# Altium PCB 驱动.PcbDoc (part 3 of 3)
Units mm, origin at the board's own origin, x right, y up, seen from the top; angles counter-clockwise.
Board outline 185 x 120 mm, 2 copper layers (Top Layer, Bottom Layer); 132 components, 68 nets, 349 pads, 106 vias.
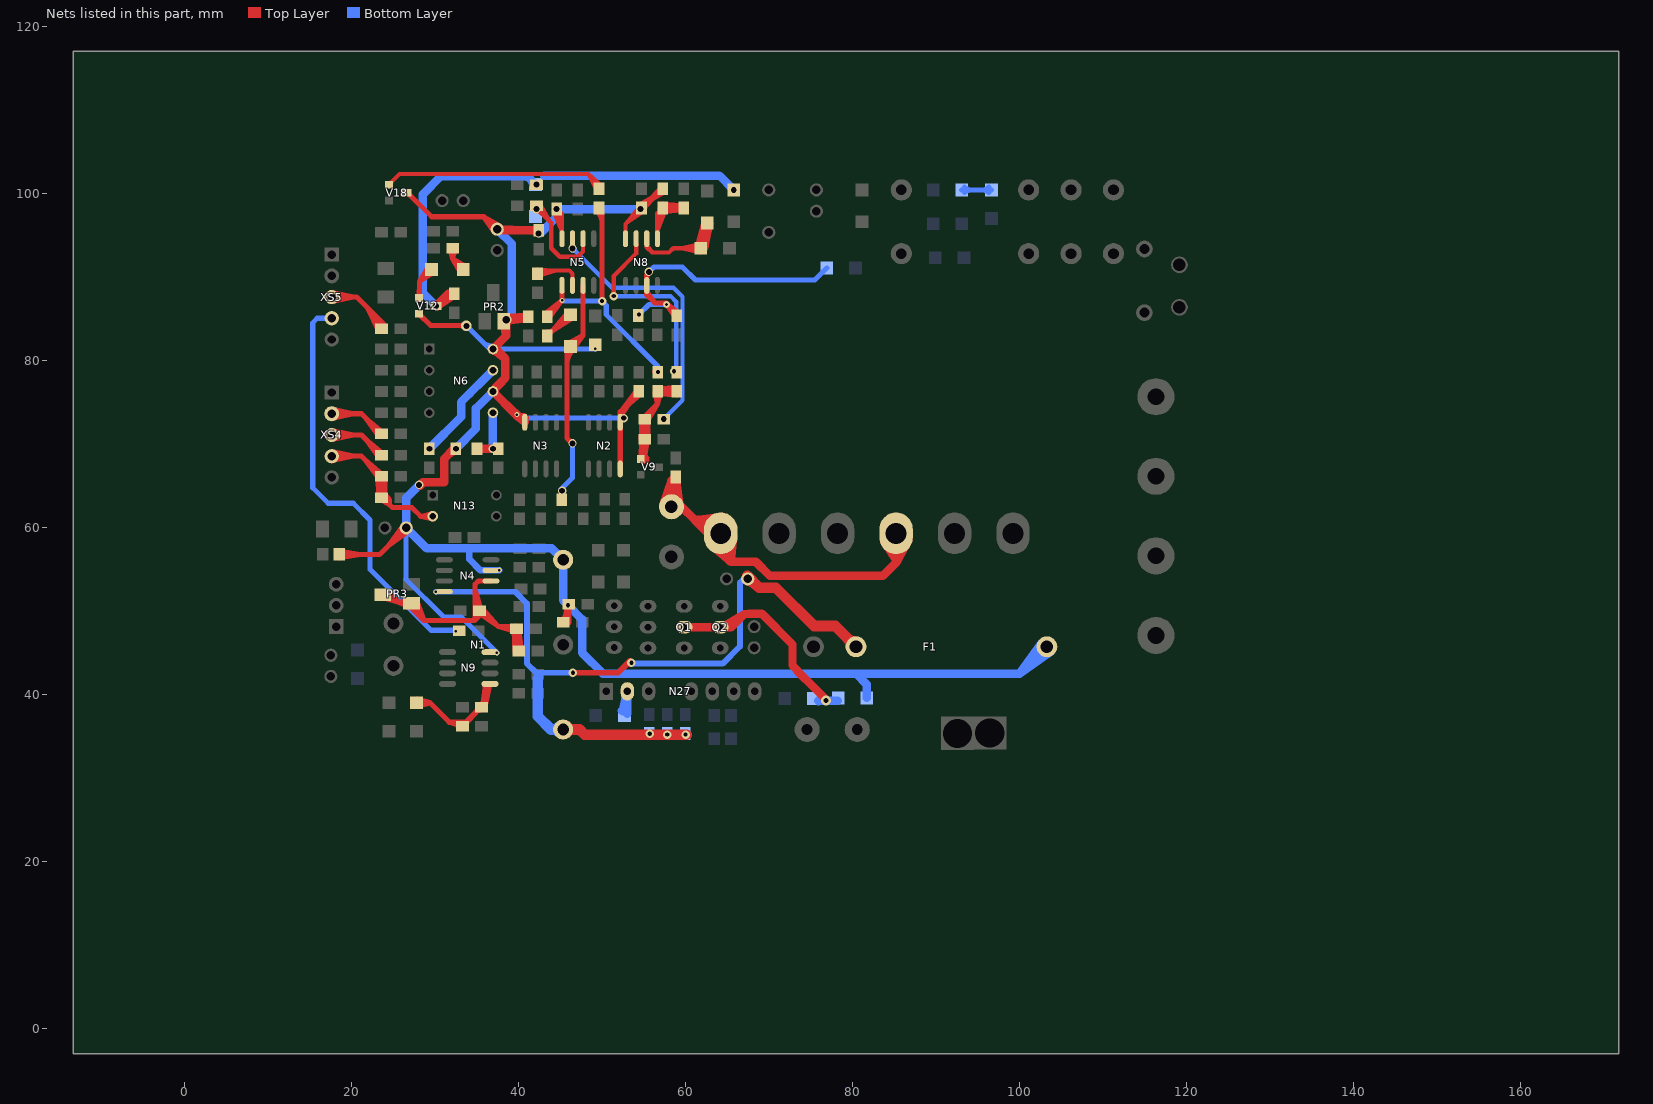
[diagram p3: the nets of this part, all layers, seen from the top]

## Via types
v1: diameter 1.016, hole 0.711, Top Layer to Bottom Layer, 31 vias
v2: diameter 1, hole 0.5, Top Layer to Bottom Layer, 28 vias
v3: diameter 0.6, hole 0.3, Top Layer to Bottom Layer, 23 vias
v4: diameter 1, hole 0.6, Top Layer to Bottom Layer, 5 vias
v5: diameter 1.016, hole 0.635, Top Layer to Bottom Layer, 4 vias
v6: diameter 1.2, hole 0.6, Top Layer to Bottom Layer, 4 vias
v7: diameter 1.1, hole 0.6, Top Layer to Bottom Layer, 3 vias
v8: diameter 0.8, hole 0.4, Top Layer to Bottom Layer, 2 vias
v9: diameter 1.27, hole 0.762, Top Layer to Bottom Layer, 2 vias
v10: diameter 0.8, hole 0.5, Top Layer to Bottom Layer, 2 vias
v11: diameter 1.27, hole 0.889, Top Layer to Bottom Layer, 1 vias
v12: diameter 1.27, hole 0.711, Top Layer to Bottom Layer, 1 vias

## Nets (pads, with @x,y where several pads share a name; then routed paths per layer and width w, separated by ;. In a path a pad name is that pad's centre, name@x,y a point inside that pad or via, vN(x,y) a via of type N, cw(c..) or ccw(c..) an arc to the next point about the centre after c; other vN are vias at no path point) (continued)
NetN4_6: N4.6 PR3.2 PR3.W R14.2 R16.1 R22.1 | length 138.5
  Top Layer w0.61: PR3.W@23.749,51.943 24.757,51.943 ; PR3.W@23.829,51.531 25.7,51 ; PR3.W@24.258,52.305 25.7,51 ; PR3.2@26.822,50.495 25.7,51 ; PR3.2@26.874,51.369 25.7,51 ; PR3.2@26.928,50.927 25.7,51 ; PR3.2@27.067,50.667 28.656,48.844 ; PR3.2@27.428,50.927 28.656,48.844 ; PR3.2@27.831,51.117 28.656,48.844 ; R16.1@34.8,49.8 34.8,53.2 35.194,53.594 ; R16.1@34.85,50.011 34.8,52.591 ; R16.1@34.857,50.11 34.744,48.844 ; R16.1@35.229,49.778 37.482,48.218 ; R16.1@35.433,50.038 37.482,48.218 ; R16.1@35.472,49.886 34.744,48.844 ; R16.1@35.5,50.2 37.567,48.133 ; R16.1@35.502,50.107 34.8,52.591 ; R16.1@35.667,50.271 37.482,48.218 ; R16.1@35.7,49.8 34.744,48.844 ; N4.6@35.992,53.594 35.194,53.594 ; N4.6@36.703,53.594 35.194,53.594 ; 38.214,48.133 cw(c38.214,46.469) R22.1@39.391,47.646 ; 38.468,48.133 cw(c38.468,46.469) 39.645,47.646 cw(c38.774,46.775) 40.005,46.775 ; R22.1@39.425,47.824 R14.2@40.005,45.386 ; R14.2@39.549,45.179 R22.1@39.471,47.634 ; R22.1@39.558,47.556 37.567,48.133 ; R22.1@39.624,47.879 37.567,48.133 ; R22.1@39.638,48.209 37.567,48.133 ; R14.2@39.675,45.203 R22.1@39.773,47.668 ; R14.2@39.676,45.234 40.005,47.676 R14.2@40.334,45.234 ; R14.2@39.676,45.243 R22.1@40.074,47.675 ; R22.1@39.751,47.879 R14.2@40.005,45.386 ; R22.1@39.772,47.646 cw(c39.208,47.082) 40.005,47.082 cw(c40.802,47.082) R22.1@40.238,47.646 ; R14.2@39.878,45.212 R22.1@39.471,47.634 ; R22.1@40,48.1 40.005,48.095 40.005,47.879 R14.2@40.005,45.212 ; R22.1@40,48.133 37.567,48.133 ; R22.1@40.081,47.891 R14.2@40.005,45.386 ; R14.2@40.199,45.289 R22.1@39.471,47.634 ; R14.2@40.331,45.265 R22.1@39.773,47.668 ; R14.2@40.335,45.225 R22.1@40.074,47.675 ; PR3.W@23.999,51.943 24.757,51.943 ; PR3.W@23.999,51.943 25.7,51 ; PR3.W@23.999,51.943 24.757,51.943 ; 24.757,51.943 cw(c24.757,52.366) 24.388,52.16 ccw(c24.757,52.366) 24.757,51.943 ; 24.757,51.943 ccw(c24.757,51.52) 24.388,51.726 cw(c24.757,51.52) 24.757,51.943 ; 24.757,51.943 25.7,51 ; 24.757,51.943 24.13,52.369 24.757,51.943 ; 24.757,51.943 24.13,51.517 24.757,51.943 ; 25.7,51 cw(c25.7,49.731) 26.609,50.616 ccw(c25.7,49.731) 25.7,51 ; 25.7,51 26.5,51 28.656,48.844 ; 28.656,48.844 34.744,48.844 ; 34.744,48.844 35.179,50.038 34.8,52.591 ; R22.1@39.773,47.668 R14.2@40.005,45.212 ; R14.2@40.005,45.212 R22.1@40.074,47.675 ; 40.005,46.009 cw(c39.208,46.009) 39.772,45.445 ccw(c39.208,46.009) 40.005,46.009 ; 40.005,46.009 ccw(c40.802,46.009) 40.238,45.445 cw(c40.802,46.009) 40.005,46.009 ; PR3.W@23.999,52.107 cw(c23.999,50.674) 25.012,51.688 ccw(c23.999,50.674) PR3.W@23.999,52.107 ; PR3.W@24.285,51.602 cw(c24.69,51.118) 25.136,51.564 ccw(c24.69,51.118) PR3.W@24.285,51.602 ; 26.029,51 ccw(c26.029,51.826) 26.613,51.242 cw(c26.029,51.826) 26.029,51 ; PR3.2@26.689,51.157 ccw(c27.126,51.021) 26.802,50.698 cw(c27.126,51.021) PR3.2@26.689,51.157 ; PR3.2@27.271,50.976 ccw(c28.213,50.682) 27.515,49.985 cw(c28.213,50.682) PR3.2@27.271,50.976 ; PR3.2@27.853,50.794 ccw(c29.3,50.343) 28.228,49.272 cw(c29.3,50.343) PR3.2@27.853,50.794 ; 34.8,51.75 ccw(c36.891,51.75) 35.412,50.271 cw(c36.891,51.75) 34.8,51.75 ; R16.1@35.433,49.708 cw(c35.433,48.358) 36.388,49.312 ccw(c35.433,48.358) R16.1@35.433,49.708
NetN5_1: N5.1 R29.2 R36.2 R41.2 | length 44.3
  Top Layer w0.61: R36.2@43.211,85.587 v3@45.1,87.1 ; R36.2@43.4,85.6 v3@45.1,87.1 ; R36.2@43.434,85.344 v3@45.1,87.1 ; R36.2@43.688,85.134 v3@45.1,87.1 ; N5.1@45.185,88.274 v3(45.2,87.2) N5.1@45.2,88.2 ; R41.2@49.9,97.7 50,97.6 v2@50,87.2 ; R29.2@56.26,78.671 R29.2@56.372,78.671 ; R36.2@43.764,85.323 cw(c45.29,85.228) 44.278,86.375 ccw(c45.29,85.228) R36.2@43.764,85.323 ; R41.2@49.397,97.896 cw(c47.94,96.439) 50,96.439 ccw(c47.94,96.439) R41.2@49.397,97.896
  Bottom Layer w0.61: v3(45.2,87.2) 45.1,87.1 v2(50,87.1) 50.5,86.6 50.5,85.479 56.7,79.279 v2(56.7,78.6) v2@56.7,78.5
NetN5_2: N5.2 R42.1 | length 17.4
  Top Layer w0.508: R42.1@42.253,90.89 44.498,90.763 ; R42.1@42.264,90.509 44.498,90.763 ; R42.1@42.264,90.763 46.074,90.763 46.455,90.382 ; R42.1@42.339,90.135 44.498,90.763 ; N5.2@46.455,88.985 46.455,90.382 ; N5.2@46.455,89.696 46.455,90.382 ; R42.1@42.533,90.24 cw(c43.797,88.976) 43.797,90.763 ; R42.1@42.533,90.24 cw(c43.797,88.976) 43.797,90.763 ; R42.1@42.533,90.24 cw(c43.797,88.976) 43.797,90.763
NetN5_3: N5.3 R38.1 V13.K | length 43.8
  Top Layer w0.61: V13.K@45.956,82.039 47.725,83.025 ; V13.K@46.2,81.6 V13.K@46.228,81.6 ; v1@46.5,70 45.8,70.7 45.8,71.2 45.796,71.204 45.796,81.096 46.228,81.528 V13.K@46.228,81.6 ; V13.K@46.579,81.355 47.725,83.025 ; 47.725,86.14 N5.3@47.725,88.274 ; N5.3@47.725,88.985 47.725,83.025 ; V13.K@46.228,81.6 46.3,81.6 47.725,83.025 ; V13.K@46.228,81.6 V13.K@46.228,81.661 47.725,83.025 ; 45.796,79.495 cw(c48.394,79.495) 46.557,81.332 ccw(c48.394,79.495) 45.796,79.495 ; V13.K@45.796,80.967 cw(c46.922,80.967) 46.126,81.763 ccw(c46.922,80.967) V13.K@45.796,80.967 ; V13.K@46.228,82.126 ccw(c46.228,83.57) 47.249,82.549 cw(c46.228,83.57) V13.K@46.228,82.126 ; V13.K@46.693,81.661 cw(c47.495,81.661) 46.928,82.228 ccw(c47.495,81.661) V13.K@46.693,81.661
  Bottom Layer w0.61: v1@45.1,64.6 46.455,65.955 v1(46.455,70.062)
  other v1: 45.2,64.4
NetN5_6: N5.6 R31.1 V11.A | length 25.2
  Top Layer w0.508: R31.1@41.985,98.25 43.691,96.702 ; R31.1@42.137,97.875 cw(c42.137,96.955) 42.787,97.606 ; R31.1@42.137,98.51 42.137,98.256 43.915,96.478 43.915,93.43 44.931,92.414 47.09,92.414 47.725,93.049 ; R31.1@42.264,98.51 43.691,96.702 ; R31.1@42.582,98.721 43.691,96.702 ; N5.6@47.725,93.862 47.725,93.049 ; N5.6@47.725,95.164 N5.6@47.725,94.573 47.725,93.049 ; R31.1@42.645,98.51 ccw(c44.485,98.51) 43.184,97.209 ; R31.1@42.645,98.51 ccw(c44.485,98.51) 43.184,97.209 ; R31.1@42.645,98.51 ccw(c44.485,98.51) 43.184,97.209
  other v1: 42.137,98.129
NetN5_7: N5.7 R39.1 | length 35.6
  Top Layer w0.508: v1@46.275,93.61 ccw(c45.842,94.043) 46.455,94.043 ccw(c47.068,94.043) v1@46.635,93.61 ; N5.7@46.455,93.862 v1(46.455,93.43) N5.7@46.455,94.573
  Bottom Layer w0.508: v1@46.455,93.176 cw(c46.455,92.563) 46.889,92.996 cw(c47.322,93.43) v1@46.709,93.43 ; v1(46.455,93.43) 51.177,88.708 58.543,88.708 59.629,87.622 59.629,82.425 59.628,75.234 v1(57.377,72.983) ; v1@57.377,73.237 ccw(c57.377,73.85) 57.811,73.417 ccw(c58.244,72.983) v1@57.631,72.983
NetN6_5: N6.5 R24.1 R34.2 | length 13.1
  Top Layer w1.016: R34.2@35.025,69.427 R24.1@37.565,69.427 R34.2@35.025,69.427
  Bottom Layer w1.016: v1(36.93,69.427) N6.5@36.93,73.745 36.93,70.062
NetN6_7: N6.7 R35.2 | length 16.5
  Bottom Layer w1.016: v1(29.31,69.427) 33.12,73.237 33.12,75.015 N6.7@36.93,78.825 34.14,76.035
NetN8_3: N8.3 R47.1 R52.1 R145.1 | length 45.4
  Top Layer w0.61: N8.3@55.345,89.696 55.345,90.255 N8.3@55.345,88.985 55.345,87.855 ; R145.1@58.668,85.267 v8@57.6,86.9 ; R145.1@58.8,85.7 v8@57.6,86.9 ; R145.1@58.928,85.471 v8@57.6,86.9 ; R145.1@59.15,85.715 v8@57.6,86.9 ; 55.345,87.855 56.3,86.9 ; 55.345,87.855 N8.3@55.345,88.274 ; 55.345,87.855 N8.3@55.345,88.274 ; N8.3@55.345,88.274 ccw(c56.356,88.274) 55.641,87.559 cw(c56.356,88.274) N8.3@55.345,88.274 ; N8.3@55.345,88.274 56.3,86.9 ; 56.3,86.9 v8@57.6,86.9 ; 58.293,86.207 cw(c57.557,85.471) 58.598,85.471 ccw(c57.557,85.471) 58.293,86.207
  Bottom Layer w0.61: v2(54.4,85.5) 55.6,86.7 v8(57.7,86.7) ; v1@55.641,90.641 56.2,91.2 59.6,91.2 61.18,89.62 75.468,89.62 R52.1@76.903,91.056
  other v1: 55.6,90.6
NetN8_5: N8.5 R10.1 R11.1 | length 66.7
  Top Layer w0.508: N8.5@56.615,94.573 56.615,97.621 R11.1@57.25,98.256 ; N8.5@56.615,95.284 56.615,97.113 ; R11.1@56.875,98.194 N8.5@56.615,95.578 ; R11.1@57.25,98.383 R10.1@59.399,98.572 ; R11.1@57.25,97.748 R10.1@59.399,97.94 ; R11.1@57.25,98.764 R10.1@59.399,98.572 ; R11.1@57.317,98.008 R10.1@59.399,98.572 ; R11.1@57.317,98.504 R10.1@59.399,97.94 ; R11.1@57.612,98.01 N8.5@56.615,95.578 ; R10.1@59.756,97.876 R11.1@57.631,98.256 ; R10.1@59.756,98.636 R11.1@57.631,98.256 ; N8.5@56.615,95.578 57.25,98.129 R10.1@59.399,97.94 ; 56.615,95.676 cw(c59.703,95.676) R11.1@57.519,97.86 ; 56.615,95.676 cw(c59.703,95.676) R11.1@57.519,97.86 ; 56.615,95.676 cw(c59.703,95.676) R11.1@57.519,97.86 ; 56.615,96.903 cw(c58.476,96.903) R11.1@57.16,98.219 ; 56.615,96.903 cw(c58.476,96.903) R11.1@57.16,98.219 ; 56.615,96.903 cw(c58.476,96.903) R11.1@57.16,98.219 ; R11.1@57.25,98.256 R10.1@59.79,98.256 R11.1@57.631,98.256 ; R11.1@57.25,98.256 R10.1@59.409,98.256 ; R11.1@57.519,97.987 cw(c58.17,97.336) 58.17,98.256 ; R11.1@57.519,97.987 cw(c58.17,97.336) 58.17,98.256 ; R11.1@57.519,97.987 cw(c58.17,97.336) 58.17,98.256 ; R11.1@57.519,98.525 ccw(c58.17,99.176) 58.17,98.256 ; R11.1@57.519,98.525 ccw(c58.17,99.176) 58.17,98.256 ; R11.1@57.519,98.525 ccw(c58.17,99.176) 58.17,98.256 ; 58.87,98.256 cw(c58.87,97.336) R10.1@59.521,97.987 ; 58.87,98.256 ccw(c58.87,99.176) R10.1@59.521,98.525 ; 58.87,98.256 cw(c58.87,97.336) R10.1@59.521,97.987 ; 58.87,98.256 ccw(c58.87,99.176) R10.1@59.521,98.525 ; 58.87,98.256 ccw(c58.87,99.176) R10.1@59.521,98.525 ; 58.87,98.256 cw(c58.87,97.336) R10.1@59.521,97.987 ; R10.1@59.409,98.256 57.284,98.636 R10.1@59.409,98.256 ; R10.1@59.409,98.256 57.284,97.876 R10.1@59.409,98.256
NetN8_6: N8.6 R17.1 V8.K | length 80.2
  Top Layer w0.508: N8.6@55.345,93.862 55.98,92.922 ; N8.6@55.345,94.573 55.345,93.557 55.98,92.922 ; R17.1@61.322,93.519 V8.K@62.086,96.358 ; R17.1@61.344,93.603 V8.K@62.584,96.287 ; R17.1@61.378,93.678 V8.K@63.024,96.103 ; R17.1@61.695,93.557 R17.1@61.822,93.43 ; R17.1@61.766,92.925 59.536,93.43 R17.1@61.766,93.935 ; V8.K@62.071,96.42 62.584,94.192 ; R17.1@62.302,93.263 V8.K@63.024,96.103 ; R17.1@62.322,93.342 V8.K@62.584,96.287 ; R17.1@62.33,93.428 V8.K@62.086,96.358 ; V8.K@63.097,96.42 62.584,94.192 ; N8.6@55.396,93.862 ccw(c56.254,93.862) 55.647,93.255 ; N8.6@55.396,93.862 ccw(c56.254,93.862) 55.647,93.255 ; N8.6@55.396,93.862 ccw(c56.254,93.862) 55.647,93.255 ; 55.98,92.922 58.012,92.922 58.52,93.43 R17.1@61.822,93.43 ; 60.596,93.43 cw(c60.596,92.204) R17.1@61.463,93.071 ; 60.596,93.43 ccw(c60.596,94.656) R17.1@61.463,93.789 ; 60.596,93.43 cw(c60.596,92.204) R17.1@61.463,93.071 ; 60.596,93.43 ccw(c60.596,94.656) R17.1@61.463,93.789 ; 60.596,93.43 ccw(c60.596,94.656) R17.1@61.463,93.789 ; 60.596,93.43 cw(c60.596,92.204) R17.1@61.463,93.071 ; R17.1@61.464,93.791 ccw(c58.8,96.478) V8.K@62.584,96.478 ; R17.1@61.464,93.791 ccw(c58.8,96.478) V8.K@62.584,96.478 ; R17.1@61.464,93.791 ccw(c58.8,96.478) V8.K@62.584,96.478 ; R17.1@61.822,93.43 ccw(c60.009,95.259) 62.584,95.259 ; R17.1@61.822,93.43 ccw(c60.009,95.259) 62.584,95.259 ; R17.1@61.822,93.43 ccw(c60.009,95.259) 62.584,95.259 ; R17.1@61.822,93.43 62.584,94.192 ; R17.1@61.822,93.43 V8.K@62.584,96.287 ; R17.1@61.822,93.43 V8.K@63.024,96.103 ; R17.1@61.822,93.43 V8.K@62.086,96.358 ; R17.1@62.18,93.069 ccw(c61.218,94.04) 62.584,94.04 ; R17.1@62.18,93.069 ccw(c61.218,94.04) 62.584,94.04 ; R17.1@62.18,93.069 ccw(c61.218,94.04) 62.584,94.04 ; V8.K@62.219,96.113 cw(c61.338,95.232) 62.584,95.232 ; V8.K@62.219,96.113 cw(c61.338,95.232) 62.584,95.232 ; V8.K@62.219,96.113 cw(c61.338,95.232) 62.584,95.232 ; 62.584,94.192 V8.K@62.584,96.478 ; 62.584,95.232 cw(c63.83,95.232) V8.K@62.949,96.113 ; 62.584,95.232 cw(c63.83,95.232) V8.K@62.949,96.113 ; 62.584,95.232 cw(c63.83,95.232) V8.K@62.949,96.113
NetN8_7: N8.7 R25.1 | length 24.6
  Top Layer w0.508: v2@51.4,87.8 51.4,90.12 54.075,92.795 ; N8.7@54.075,93.862 54.075,92.795 ; N8.7@54.075,93.938 54.075,92.795
  Bottom Layer w0.508: v2@51.4,87.9 51.6,87.7 58.2,87.7 58.866,87.033 58.866,78.966 v2(58.6,78.7)
  other v2: 51.4,87.7
NetN9_5: N9.5 R72.1 R75.2 R143.1 | length 44.8
  Top Layer w0.635: R72.1@27.774,39.021 29.379,39.021 ; R72.1@27.836,38.58 29.379,39.021 ; R72.1@27.836,39.461 29.379,39.021 ; R143.1@33.147,36.195 31.7,36.7 ; R143.1@33.401,36.195 R75.2@35.208,38.208 ; R143.1@33.642,36.464 R75.2@35.433,38.481 ; R75.2@35.5,38.4 35.4,38.4 33.7,36.7 31.7,36.7 ; R75.2@36,38.4 36,40.699 ; R75.2@36,38.753 N9.5@36.576,41.275 36,40.699 ; N9.5@36.517,41.019 35.687,38.481 36,40.699 ; 28.848,39.021 cw(c28.848,40.094) 28.089,39.335 ccw(c28.848,40.094) 28.848,39.021 ; 28.848,39.021 ccw(c28.848,37.947) 28.089,38.706 cw(c28.848,37.947) 28.848,39.021 ; 29.379,39.021 31.7,36.7 ; 31.7,36.7 cw(c31.7,35.334) 32.874,36.033 ccw(c31.7,35.334) 31.7,36.7 ; 36,40.699 35.916,41.275 36,40.699 ; R143.1@33.718,36.195 cw(c34.982,36.195) 34.089,37.089 ccw(c34.982,36.195) R143.1@33.718,36.195 ; R75.2@34.857,37.857 ccw(c34.233,38.481) 35.115,38.481 cw(c34.233,38.481) R75.2@34.857,37.857 ; R75.2@34.973,37.973 cw(c35.433,37.513) 35.433,38.163 ccw(c35.433,37.513) R75.2@34.973,37.973 ; R75.2@35.462,38.706 ccw(c34.165,40.003) 36,40.003 cw(c34.165,40.003) R75.2@35.462,38.706
NetN27_2: N27.2 R4.2 | length 9.1
  Bottom Layer w1: R4.2@52.356,38.068 ccw(c50.8,39.624) N27.2@53,39.624 ; R4.2@53,37.7 53,40.4 52.451,37.973 N27.2@53.027,40.074
NetQ1_1: Q1.1 Q2.1 R1.2 R3.2 | length 54
  Top Layer w1: Q1.1@59.8,48.1 59.829,48.071 Q2.1@64.135,48.071 65.471,48.071 ; Q1.1@60.067,48.071 Q2.1@63.817,48.071 ; 73.3,43 72.8,43.5 72.8,46 69.126,49.674 67.561,49.674 67.532,49.646 67.046,49.646 ; 73.348,42.852 75.5,40.7 76.8,39.4 v6(76.8,39.3) ; Q2.1@64.385,48.071 67.046,49.646 ; Q2.1@64.385,48.071 65.471,48.071 ; Q2.1@64.385,48.071 65.471,48.071 ; 65.471,48.071 67.046,49.646 ; Q1.1@60.135,48.071 63.885,48.071 Q1.1@60.135,48.071 ; Q2.1@64.385,48.321 ccw(c64.385,51.546) 66.666,49.266 cw(c64.385,51.546) Q2.1@64.385,48.321
  Bottom Layer w1: R3.2@75.843,39.247 R3.2@75.9,39.304 ; R3.2@75.9,39.2 R3.2@75.943,39.243 ; R3.2@75.943,39.243 78.232,39.243 75.97,39.247 78.105,39.243 R3.2@75.943,39.243
NetR5_2: R5.2 R6.1 | length 14
  Bottom Layer w0.61: R5.2@93.064,100.415 R6.1@96.62,100.415 ; R5.2@93.387,100.092 cw(c94.168,99.311) 94.168,100.415 ; R5.2@93.387,100.092 cw(c94.168,99.311) 94.168,100.415 ; R5.2@93.387,100.092 cw(c94.168,99.311) 94.168,100.415 ; R5.2@93.387,100.738 ccw(c94.168,101.519) 94.168,100.415 ; R5.2@93.387,100.738 ccw(c94.168,101.519) 94.168,100.415 ; R5.2@93.387,100.738 ccw(c94.168,101.519) 94.168,100.415 ; 95.516,100.415 cw(c95.516,99.311) R6.1@96.297,100.092 ; 95.516,100.415 ccw(c95.516,101.519) R6.1@96.297,100.738 ; 95.516,100.415 cw(c95.516,99.311) R6.1@96.297,100.092 ; 95.516,100.415 ccw(c95.516,101.519) R6.1@96.297,100.738 ; 95.516,100.415 ccw(c95.516,101.519) R6.1@96.297,100.738 ; 95.516,100.415 cw(c95.516,99.311) R6.1@96.297,100.092
NetR18_0: pad.4 pad.7 R18.0 R21.1 | length 106.6
  Top Layer w1.016: R18.0@57.314,62.642 R21.1@58.293,65.593 ; R18.0@57.343,62.768 R21.1@58.801,65.913 ; R18.0@57.592,63.185 ccw(c55.898,64.879) 58.293,64.879 ccw(c60.688,64.879) R18.0@58.994,63.185 ; R18.0@58.291,62.508 cw(c58.503,60.152) 60.176,61.824 ; 58.293,64.38 cw(c60.334,64.38) R21.1@58.891,65.823 ; R21.1@58.8,66.1 R21.1@58.293,65.593 ; R18.0@59.272,62.642 R21.1@58.293,65.593 ; R18.0@59.285,62.481 R21.1@58.801,65.913 ; 62.315,60.9 cw(c62.315,59.461) pad.4@63.732,59.716 ; pad.4@62.732,59.536 ccw(c61.1,59.242) 61.1,60.9 ; pad.4@62.996,57.918 65.4,55.9 ; pad.4@63.395,58.544 61.1,60.9 ; pad.4@64.2,58.8 65.4,55.9 ; pad.4@64.2,59.3 64.2,57.1 65.4,55.9 ; pad.4@64.2,59.8 61.1,60.9 ; pad.4@64.367,61.283 61.1,60.9 ; pad.4@64.4,59.2 64.5,59.3 64.5,60.9 61.1,60.9 ; pad.4@65.675,59.026 65.4,55.9 ; pad.7@83.772,58.367 85.3,55.9 ; pad.7@84.244,58.154 cw(c82.362,55.899) 85.3,55.899 ; pad.7@84.398,57.542 cw(c83.352,55.898) 85.3,55.898 ; pad.7@85.2,58.8 85.3,55.9 ; 85.3,55.939 cw(c88.561,55.939) pad.7@86.255,58.245 ; pad.7@85.3,59.4 85.3,55.9 ; pad.7@86.134,57.636 ccw(c87.528,55.898) 85.3,55.898 ; pad.7@86.654,58.466 85.3,55.9 ; R18.0@58.293,62.484 59.516,62.484 61.1,60.9 ; R18.0@58.293,62.484 R21.1@58.293,65.593 ; R18.0@58.293,62.484 R21.1@58.801,65.913 ; 65.4,55.9 68.4,55.9 70.1,54.2 83.6,54.2 85.3,55.9
NetR25_2: R25.2 R29.1 R30.1 R39.2 V9.B | length 126.2
  Top Layer w0.61: V9.B@54.502,68.307 ccw(c53.081,69.728) 55.091,69.728 ; R30.1@54.634,70.565 R39.2@54.762,72.96 ; V9.B@54.697,68.074 cw(c55.006,67.633) 55.386,68.014 ; R30.1@54.892,70.62 R39.2@55.42,72.96 ; V9.B@54.933,67.876 ccw(c54.553,68.256) 55.091,68.256 ; R30.1@54.964,70.57 R39.2@54.762,72.96 ; R39.2@54.971,73.202 56.653,74.853 ; 55.091,68.939 ccw(c55.985,68.939) 55.353,68.307 ; R39.2@55.1,73.3 56.653,74.853 ; R30.1@55.218,70.57 R39.2@55.42,72.96 ; R39.2@55.218,72.983 56.653,74.853 ; R30.1@55.29,70.62 R39.2@54.762,72.96 ; R30.1@55.405,70.445 V9.B@54.61,68.199 ; R30.1@55.42,70.546 55.091,68.309 ; R39.2@55.472,73.364 R39.2@55.091,72.983 ; R39.2@55.493,72.801 56.653,74.853 ; R30.1@55.548,70.565 R39.2@55.42,72.96 ; R29.1@56.325,76.132 56.653,74.853 ; R29.1@56.372,76.385 R25.2@58.785,76.385 ; R29.1@56.605,76.152 cw(c57.169,75.588) 57.169,76.385 cw(c57.169,77.182) R29.1@56.605,76.618 ; R29.1@56.653,76.173 56.653,74.853 ; R29.1@56.981,76.132 56.653,74.853 ; R25.2@58.552,76.152 ccw(c57.988,75.588) 57.988,76.385 ccw(c57.988,77.182) R25.2@58.552,76.618 ; R25.2@58.886,76.101 R29.1@56.665,76.63 ; R25.2@58.886,76.499 R29.1@56.692,75.972 ; R25.2@58.906,75.971 R29.1@56.471,76.385 ; R25.2@58.915,75.971 R29.1@56.653,76.3 ; R25.2@58.915,76.629 R29.1@56.653,76.3 ; R25.2@58.928,76.63 R29.1@56.471,76.385 ; R25.2@58.939,76.173 R29.1@56.692,75.972 ; R25.2@58.939,76.427 R29.1@56.665,76.63 ; R25.2@58.944,75.843 R29.1@56.692,75.972 ; R25.2@58.944,76.757 R29.1@56.665,76.63 ; V9.B@54.61,68.199 55.2,68.2 55.091,68.309 ; V9.B@54.61,68.199 55.091,68.309 ; V9.B@54.61,68.199 R30.1@55.091,70.57 ; V9.B@54.61,68.199 55.091,68.309 ; V9.B@54.61,68.199 55.091,68.309 ; V9.B@54.61,68.199 54.762,70.546 55.091,68.309 ; V9.B@54.61,68.199 55.091,68.309 ; R39.2@54.762,72.96 R30.1@55.091,70.57 ; 55.091,68.309 R30.1@55.091,70.57 ; 55.091,69.773 cw(c55.888,69.773) 55.324,70.337 ccw(c55.888,69.773) 55.091,69.773 ; 55.091,69.773 ccw(c54.294,69.773) 54.858,70.337 cw(c54.294,69.773) 55.091,69.773 ; R30.1@55.091,70.57 R39.2@55.091,72.983 ; R30.1@55.091,70.57 R39.2@55.42,72.96 ; R30.1@55.091,70.57 R39.2@55.091,72.983 ; 55.091,71.367 cw(c54.294,71.367) 54.858,70.803 ccw(c54.294,71.367) 55.091,71.367 ; 55.091,71.367 ccw(c55.888,71.367) 55.324,70.803 cw(c55.888,71.367) 55.091,71.367 ; 55.091,72.186 cw(c55.888,72.186) 55.324,72.75 ccw(c55.888,72.186) 55.091,72.186 ; 55.091,72.186 ccw(c54.294,72.186) 54.858,72.75 cw(c54.294,72.186) 55.091,72.186 ; R39.2@55.091,72.983 54.762,70.593 R39.2@55.091,72.983 ; R39.2@55.091,72.983 55.42,70.593 R39.2@55.091,72.983 ; R29.1@56.471,76.385 R25.2@58.939,76.3 R29.1@56.653,76.3 ; 56.653,74.853 R29.1@56.653,76.3 ; 56.653,75.376 cw(c57.45,75.376) 56.886,75.94 ccw(c57.45,75.376) 56.653,75.376 ; 56.653,75.376 ccw(c55.856,75.376) 56.42,75.94 cw(c55.856,75.376) 56.653,75.376 ; R29.1@56.653,76.3 R25.2@58.785,76.385 ; R29.1@56.665,76.63 R25.2@58.785,76.385 ; R29.1@56.692,75.972 R25.2@58.785,76.385 ; R39.2@55.548,72.983 cw(c57.396,72.983) 56.089,74.289 ccw(c57.396,72.983) R39.2@55.548,72.983 ; R29.1@56.886,76.194 cw(c57.349,75.731) 57.349,76.385 ccw(c57.349,75.731) R29.1@56.886,76.194 ; R29.1@56.886,76.66 ccw(c57.552,77.326) 57.552,76.385 cw(c57.552,77.326) R29.1@56.886,76.66 ; 58.04,76.385 ccw(c58.04,77.326) 58.706,76.66 cw(c58.04,77.326) 58.04,76.385 ; 58.243,76.385 cw(c58.243,75.731) 58.706,76.194 ccw(c58.243,75.731) 58.243,76.385
NetR33_2: R33.2 R44.1 V11.K V12.C V15.A | length 74.6
  Top Layer w1.016: 30.67,87.066 cw(c32.274,85.462) R44.1@32.274,87.731 ; 30.67,87.066 cw(c32.274,85.462) R44.1@32.274,87.731 ; 30.67,87.066 cw(c32.274,85.462) R44.1@32.274,87.731 ; 31.588,87.985 R44.1@32.274,87.985 31.588,87.985 ; 31.588,87.985 v1(30.115,86.512) 32.274,87.858 30.293,86.512 31.588,87.985 ; 31.245,87.642 cw(c31.915,86.972) 32.232,87.865 ccw(c31.915,86.972) 31.245,87.642
  Bottom Layer w1.016: v1(30.115,86.512) 28.55,88.077 28.55,99.9 30.716,102.066 40.994,102.066 ; 40.573,102.066 cw(c40.573,100.881) V11.K@41.75,101.019 ; 43.09,102.129 64.045,102.129 v1(65.759,100.415) ; 40.994,102.066 V11.K@42.01,101.05 ; 40.994,102.066 V11.K@42.01,101.05 ; 40.994,102.066 V11.K@42.01,101.05
  other v1: 42.137,101.05
NetR36_1: R36.1 V13.A | length 17
  Top Layer w0.61: R36.1@43.4,82.9 45.971,85.471 V13.A@46.228,85.471 R36.1@44.064,83.564 ; V13.A@45.893,85.794 R36.1@44.064,83.564 ; V13.A@46.506,85.098 R36.1@44.064,83.564 ; R36.1@43.434,83.388 ccw(c43.434,84.485) 44.209,83.709 cw(c43.434,84.485) R36.1@43.434,83.388 ; 44.995,84.495 cw(c46.228,83.262) 46.228,85.006 ccw(c46.228,83.262) 44.995,84.495
NetR41_1: R41.1 V18.B | length 39.6
  Top Layer w0.508: V18.B@24.484,101.05 25.754,102.32 48.36,102.32 ; R41.1@49.308,100.465 48.36,102.32 ; R41.1@49.63,100.542 49.63,101.05 48.36,102.32 ; R41.1@49.63,100.669 48.36,102.32 ; R41.1@49.909,100.928 48.36,102.32 ; V18.B@24.484,101.253 ccw(c24.484,101.744) V18.B@24.831,101.397 ; V18.B@24.484,101.253 ccw(c24.484,101.744) V18.B@24.831,101.397 ; V18.B@24.484,101.253 ccw(c24.484,101.744) V18.B@24.831,101.397 ; V18.B@24.687,101.05 cw(c25.178,101.05) V18.B@24.831,101.397 ; V18.B@24.687,101.05 cw(c25.178,101.05) V18.B@24.831,101.397 ; V18.B@24.687,101.05 cw(c25.178,101.05) V18.B@24.831,101.397 ; 48.71,101.97 cw(c47.409,100.669) R41.1@49.249,100.669 ; 48.71,101.97 cw(c47.409,100.669) R41.1@49.249,100.669 ; 48.71,101.97 cw(c47.409,100.669) R41.1@49.249,100.669
NetR43_2: R43.2 V14.A | length 18.2
  Top Layer w0.61: R43.2@31.777,93.387 32.104,92.16 ; R43.2@32.104,93.43 32.104,92.16 ; R43.2@32.431,93.387 32.104,92.16 ; V14.A@33.005,90.606 32.104,92.16 ; V14.A@33.374,90.89 32.104,92.16 ; V14.A@33.658,91.259 32.104,92.16 ; R43.2@31.871,93.197 cw(c31.307,92.633) 32.104,92.633 ; R43.2@31.871,93.197 cw(c31.307,92.633) 32.104,92.633 ; R43.2@31.871,93.197 cw(c31.307,92.633) 32.104,92.633 ; 32.104,92.633 cw(c32.901,92.633) R43.2@32.337,93.197 ; 32.104,92.633 cw(c32.901,92.633) R43.2@32.337,93.197 ; 32.104,92.633 cw(c32.901,92.633) R43.2@32.337,93.197 ; 32.58,91.684 cw(c31.786,90.89) V14.A@32.909,90.89 ; 32.58,91.684 ccw(c33.374,92.478) V14.A@33.374,91.355 ; 32.58,91.684 cw(c31.786,90.89) V14.A@32.909,90.89 ; 32.58,91.684 ccw(c33.374,92.478) V14.A@33.374,91.355 ; 32.58,91.684 ccw(c33.374,92.478) V14.A@33.374,91.355 ; 32.58,91.684 cw(c31.786,90.89) V14.A@32.909,90.89
NetV12_B: V12.B V14.K | length 18.9
  Top Layer w0.61: V12.B@28.15,87.4 V12.B@28.15,87.544 ; V14.K@29.199,91.178 28.15,89.476 ; V14.K@29.852,90.525 28.15,89.476 ; V12.B@27.975,87.585 ccw(c27.553,88.007) 28.15,88.007 ; V12.B@27.975,87.585 ccw(c27.553,88.007) 28.15,88.007 ; V12.B@27.975,87.585 ccw(c27.553,88.007) 28.15,88.007 ; V12.B@28.15,87.544 28.15,89.476 ; V12.B@28.15,87.544 V12.B@28.083,87.477 28.15,89.476 ; 28.15,89.476 V14.K@29.564,90.89 28.15,89.476 ; 28.77,90.096 cw(c29.564,89.302) V14.K@29.564,90.425 ; 28.77,90.096 ccw(c27.976,90.89) V14.K@29.099,90.89 ; 28.77,90.096 cw(c29.564,89.302) V14.K@29.564,90.425 ; 28.77,90.096 ccw(c27.976,90.89) V14.K@29.099,90.89 ; 28.77,90.096 ccw(c27.976,90.89) V14.K@29.099,90.89 ; 28.77,90.096 cw(c29.564,89.302) V14.K@29.564,90.425
REF+: R13.2 XS4.2 | length 33.5
  Top Layer w0.61: XS4.2@17.499,73.618 21.182,73.618 R13.2@23.595,71.205 22.96,71.84 ; XS4.2@17.626,73.618 20.355,73.618 ; XS4.2@17.691,73.026 20.355,73.618 ; XS4.2@17.691,74.21 20.355,73.618 ; R13.2@23.213,70.995 21.667,73.133 ; R13.2@23.468,71.205 21.667,73.133 ; R13.2@23.695,71.445 21.667,73.133 ; XS4.2@18.047,73.197 cw(c19.063,72.181) 19.063,73.618 ; XS4.2@18.047,73.197 cw(c19.063,72.181) 19.063,73.618 ; XS4.2@18.047,73.197 cw(c19.063,72.181) 19.063,73.618 ; XS4.2@18.047,74.039 ccw(c19.063,75.055) 19.063,73.618 ; XS4.2@18.047,74.039 ccw(c19.063,75.055) 19.063,73.618 ; XS4.2@18.047,74.039 ccw(c19.063,75.055) 19.063,73.618 ; 22.815,71.985 cw(c22.034,71.205) R13.2@23.138,71.205 ; 22.815,71.985 cw(c22.034,71.205) R13.2@23.138,71.205 ; 22.815,71.985 cw(c22.034,71.205) R13.2@23.138,71.205
VCC: C1.1 C2.1 C3.1 C4.1 C5.1 C6.1 C7.1 C8.1 C24.1 C26.1 F1.3 N1.5 N2.4 N2.5 N3.8 N4.7 N5.8 N6.6 N6.8 N8.8 N9.8 PR2.2 R1.1 R11.2 R46.1 R76.1 V12.E V18.C | length 491.5
  Top Layer w0.508: C7.1@44.188,97.883 N5.8@45.185,95.455 ; C7.1@44.192,97.871 45.185,95.712 ; C7.1@44.283,97.73 45.185,97.113 ; C7.1@44.55,97.875 cw(c44.55,97.262) 44.984,97.695 cw(c45.417,98.129) C7.1@44.804,98.129 ; v1(44.55,98.129) 45.185,97.494 N5.8@45.185,94.573 ; C7.1@44.894,98.166 45.185,97.113 ; C7.1@44.924,98.074 45.185,95.712 ; C7.1@44.925,98.067 N5.8@45.185,95.455 ; N5.8@45.185,95.284 45.185,97.113 ; N8.8@52.805,94.573 52.805,96.351 ; N8.8@52.805,95.284 52.805,96.351 ; C8.1@54.429,98.387 52.997,96.543 ; C8.1@54.497,98.699 56.489,99.814 ; C8.1@54.583,97.875 ccw(c54.583,97.262) C8.1@54.149,97.695 ; C8.1@54.583,98.383 ccw(c54.583,98.996) 55.017,98.563 ccw(c55.45,98.129) C8.1@54.837,98.129 ; C8.1@54.71,98.129 52.997,96.543 ; C8.1@54.945,97.829 52.997,96.543 ; C8.1@54.973,98.107 56.489,99.814 ; R11.2@56.99,100.693 55.433,98.979 ; R11.2@57.25,100.415 55.433,98.979 ; R11.2@57.25,100.542 56.996,100.542 C8.1@54.71,98.256 52.805,96.351 ; R11.2@57.461,100.098 55.433,98.979 ; C7.1@44.281,97.733 cw(c42.097,95.549) N5.8@45.185,95.549 ; C7.1@44.281,97.733 cw(c42.097,95.549) N5.8@45.185,95.549 ; C7.1@44.281,97.733 cw(c42.097,95.549) N5.8@45.185,95.549 ; C7.1@44.55,98.002 N5.8@45.185,95.455 ; C7.1@44.55,98.002 45.185,97.113 ; C7.1@44.55,98.002 45.185,95.712 ; C7.1@44.64,98.092 cw(c43.324,96.776) 45.185,96.776 ; C7.1@44.64,98.092 cw(c43.324,96.776) 45.185,96.776 ; C7.1@44.64,98.092 cw(c43.324,96.776) 45.185,96.776 ; 53.843,97.389 cw(c54.71,96.522) C8.1@54.71,97.748 ; 53.843,97.389 cw(c54.71,96.522) C8.1@54.71,97.748 ; 53.843,97.389 cw(c54.71,96.522) C8.1@54.71,97.748 ; C8.1@54.149,97.695 ccw(c53.716,98.129) C8.1@54.329,98.129 ; C8.1@54.149,97.695 ccw(c53.716,98.129) C8.1@54.329,98.129 ; C8.1@54.149,97.695 ccw(c53.716,98.129) C8.1@54.329,98.129 ; C8.1@54.149,97.695 ccw(c53.716,98.129) C8.1@54.329,98.129 ; C8.1@54.533,98.72 55.433,98.979 ; C8.1@54.533,98.72 55.433,98.979 ; C8.1@54.533,98.72 55.433,98.979 ; C8.1@54.71,98.383 55.433,98.979 ; C8.1@54.71,98.383 55.433,98.979 ; C8.1@54.71,98.383 56.489,99.814 ; C8.1@54.71,98.383 55.433,98.979 ; C8.1@54.71,98.764 ccw(c54.71,99.99) 55.577,99.123 ; C8.1@54.71,98.764 ccw(c54.71,99.99) 55.577,99.123 ; C8.1@54.71,98.764 ccw(c54.71,99.99) 55.577,99.123 ; C8.1@55.007,98.144 55.433,98.979 ; C8.1@55.007,98.144 55.433,98.979 ; C8.1@55.007,98.144 55.433,98.979 ; C8.1@55.091,98.383 cw(c55.704,98.383) C8.1@55.271,98.817 ; C8.1@55.091,98.383 cw(c55.704,98.383) C8.1@55.271,98.817 ; C8.1@55.091,98.383 cw(c55.704,98.383) C8.1@55.271,98.817 ; 55.949,99.495 cw(c57.25,98.194) R11.2@57.25,100.034 ; 55.949,99.495 cw(c57.25,98.194) R11.2@57.25,100.034 ; 55.949,99.495 cw(c57.25,98.194) R11.2@57.25,100.034
  Top Layer w0.61: R76.1@18.542,56.769 23.369,56.769 C1.1@26.5,59.9 ; R76.1@18.573,56.375 21.071,56.769 R76.1@18.573,57.163 ; C1.1@26.175,60.256 24.463,57.863 ; C1.1@26.543,59.944 24.463,57.863 ; V18.C@26.694,100.085 28.395,98.409 ; V18.C@26.77,100.034 29.604,97.2 35.827,97.2 ; C1.1@26.855,59.576 24.463,57.863 ; V12.E@28.083,85.572 29.48,84.175 33.725,84.175 v12(33.75,84.15) ; 32.892,84.175 cw(c32.892,83.292) v12@33.517,83.917 ; 33.013,84.175 ccw(c33.013,84.887) v12@33.517,84.383 ; C26.1@37.057,95.97 C26.1@37.375,95.652 ; C26.1@37.074,95.399 35.827,97.2 ; C26.1@37.438,95.716 35.827,97.2 ; C26.1@37.565,95.462 C26.1@37.375,95.652 ; C26.1@37.724,96.105 35.827,97.2 ; N2.4@52.17,67.014 N2.5@52.17,72.602 52.17,73.87 ; N2.4@52.17,67.725 52.17,69.859 ; 52.17,69.757 N2.5@52.17,71.891 ; 53.501,75.201 N2.5@52.17,73.313 ; C4.1@54.114,76.385 52.515,74.215 ; C4.1@54.3,76 52.17,73.87 ; C4.1@54.367,76.173 52.515,74.215 ; C4.1@54.593,75.932 52.515,74.215 ; 19.496,56.769 cw(c19.496,57.723) 18.821,57.048 ccw(c19.496,57.723) 19.496,56.769 ; 19.496,56.769 ccw(c19.496,55.815) 18.821,56.49 cw(c19.496,55.815) 19.496,56.769 ; 35.827,97.2 C26.1@37.375,95.652 ; 36.397,96.63 ccw(c37.438,97.67) C26.1@37.438,96.199 ; 36.397,96.63 ccw(c37.438,97.67) C26.1@37.438,96.199 ; 36.397,96.63 ccw(c37.438,97.67) C26.1@37.438,96.199 ; 36.704,96.323 cw(c36.097,95.716) C26.1@36.955,95.716 ; 36.704,96.323 cw(c36.097,95.716) C26.1@36.955,95.716 ; 36.704,96.323 cw(c36.097,95.716) C26.1@36.955,95.716 ; N2.5@52.17,73.313 cw(c53.514,73.313) 52.564,74.264 ccw(c53.514,73.313) N2.5@52.17,73.313 ; N2.5@52.17,73.313 52.17,73.87 ; N2.5@52.17,73.313 52.17,73.87 ; 25.718,59.118 ccw(c24.893,59.944) 26.06,59.944 cw(c24.893,59.944) 25.718,59.118 ; 25.721,59.121 cw(c26.543,58.299) 26.543,59.461 ccw(c26.543,58.299) 25.721,59.121 ; 53.728,75.428 ccw(c52.984,76.173) 54.037,76.173 cw(c52.984,76.173) 53.728,75.428
  Top Layer w0.71: C2.1@45.268,48.839 ccw(c43.527,50.58) C3.1@45.989,50.58 ; C3.1@45.791,50.594 cw(c45.313,50.116) 45.989,50.116 cw(c46.665,50.116) C3.1@46.187,50.594 ; v2(45.9,50.7) C3.1@45.989,50.611 ; C3.1@45.989,50.611 45.989,48.633 C3.1@45.989,50.792 45.466,48.641 C3.1@45.989,50.611
  Top Layer w1.016: v1@28.2,65 28.4,65.2 28.4,65.3 28.5,65.4 31.088,65.4 31.088,68.219 32.296,69.427 v1(32.485,69.427) ; N6.8@37.083,81.517 38.4,80.2 ; N6.6@37.2,76.7 38.4,77.9 ; C26.1@38.073,95.589 R46.1@42.391,95.589 38.708,95.589 C26.1@37.438,95.716 ; 38.217,74.998 N3.8@40.74,72.602 ; PR2.2@38.227,84.459 38.5,82.935 ; PR2.2@38.454,84.921 PR2.2@38.493,84.882 ; N3.8@40.6,73.2 40.015,73.2 ; C5.1@41.148,85.09 PR2.2@38.227,84.709 41.2,85.1 PR2.2@38.7,85.1 ; C5.1@41.148,85.217 PR2.2@38.7,85.1 ; 41.281,95.589 C26.1@37.438,95.716 ; 41.307,95.589 C26.1@37.438,95.716 ; 41.471,95.589 cw(c41.471,94.288) v1(42.391,95.208) ; N1.5@45.339,56.061 N1.5@45.339,56.134 N1.5@45.5,55.973 ; 31.729,68.86 cw(c32.485,68.104) C6.1@32.485,69.173 ; 31.729,68.86 cw(c32.485,68.104) C6.1@32.485,69.173 ; 31.729,68.86 cw(c32.485,68.104) C6.1@32.485,69.173 ; C26.1@37.636,95.914 ccw(c38.419,96.697) 38.419,95.589 ; C26.1@37.636,95.914 ccw(c38.419,96.697) 38.419,95.589 ; C26.1@37.636,95.914 ccw(c38.419,96.697) 38.419,95.589 ; 38.4,77.9 38.4,80.2 ; 38.4,77.9 N6.6@36.93,76.285 40.015,73.2 ; 38.4,80.2 N6.8@36.93,81.365 38.5,82.935 ; 38.5,82.935 38.5,84.9 PR2.2@38.7,85.1 ; 40.015,73.2 N3.8@40.74,72.602 ; 40.015,73.2 N3.8@40.74,72.602 ; N6.8@36.93,81.238 cw(c36.93,80.195) 37.667,80.933 ccw(c36.93,80.195) N6.8@36.93,81.238 ; PR2.2@38.056,84.288 cw(c36.984,83.216) 38.5,83.216 ccw(c36.984,83.216) PR2.2@38.056,84.288 ; PR2.2@38.398,84.788 cw(c39.152,84.034) 39.152,85.1 ccw(c39.152,84.034) PR2.2@38.398,84.788 ; v3@39.656,73.559 ccw(c40.74,74.643) 40.74,73.11 cw(c40.74,74.643) v3@39.656,73.559
  Bottom Layer w0.61: C1.1@26.5,60 26.5,53.8 31,49.3 33.1,49.3 v3(37.4,45) ; v12(33.75,84.15) 36.535,81.365 N6.8@36.93,81.365 v3(49.2,81.4) ; v3@39.9,73.5 39.9,73.4 40.2,73.1 v5(52.6,73.1) ; 35.692,82.208 ccw(c36.93,83.446) 36.93,81.695 cw(c36.93,83.446) 35.692,82.208
  Bottom Layer w0.8: 34.1,57.5 34.1,56.2 35.4,54.9 v3(37.7,54.9)
  Bottom Layer w1.016: C1.1@26.5,60 C1.1@26.543,59.957 ; v1(28.1,65.1) 26.543,63.543 ; v1(32.485,69.427) 34.898,71.84 34.898,74.253 ; C26.1@37.438,95.716 39.2,93.954 39.2,85.5 v11@38.5,84.8 ; v1(42.391,95.208) 42.596,95.208 44.55,97.162 v1(44.55,98.129) v1(54.583,98.129) ; R1.1@81.693,39.585 81.693,41.207 80.4,42.5 ; 101.931,44.431 cw(c103.251,43.112) F1.3@103.251,44.978 ; 102.006,44.506 ccw(c100.792,45.72) F1.3@102.509,45.72 ; F1.3@102.688,46.203 100,42.5 ; F1.3@103.251,45.72 100,42.5 ; F1.3@103.3,45.8 100,42.5 ; F1.3@103.729,45.152 100,42.5 ; C1.1@26.543,59.944 C1.1@26.543,59.957 ; C1.1@26.543,59.944 26.543,63.543 ; C1.1@26.543,59.944 29,57.5 ; C1.1@26.543,59.957 26.543,63.543 ; C1.1@26.543,59.957 29,57.5 ; 29,57.5 34.1,57.5 43.973,57.5 N1.5@45.339,56.134 45.339,51.261 v2(45.9,50.7) 47.6,49 47.6,45 50.1,42.5 80.4,42.5 ; 34.898,74.253 N6.6@36.93,76.285 34.898,74.253 ; 80.4,42.5 100,42.5
  other v3: 39.8,73.5
  other v11: 38.5,84.85
"VF OUT": R48.1 XS5.3 | length 49.5
  Top Layer w0.61: XS5.3@17.626,87.588 20.612,87.588 23.595,84.605 ; XS5.3@17.681,87.046 20.305,87.588 XS5.3@17.681,88.13 ; R48.1@23.178,83.62 21.925,86.275 ; 23.182,85.018 cw(c22.563,84.4) R48.1@23.312,83.948 ; R48.1@23.468,83.778 21.925,86.275 ; 23.732,84.467 cw(c23.251,83.986) R48.1@23.834,83.634 ; R48.1@23.739,83.967 21.925,86.275 ; XS5.3@18.012,87.202 cw(c18.942,86.272) 18.942,87.588 ; XS5.3@18.012,87.202 cw(c18.942,86.272) 18.942,87.588 ; XS5.3@18.012,87.202 cw(c18.942,86.272) 18.942,87.588 ; XS5.3@18.012,87.974 ccw(c18.942,88.904) 18.942,87.588 ; XS5.3@18.012,87.974 ccw(c18.942,88.904) 18.942,87.588 ; XS5.3@18.012,87.974 ccw(c18.942,88.904) 18.942,87.588 ; 22.23,85.97 cw(c20.037,83.778) R48.1@23.138,83.778 ; 22.23,85.97 cw(c20.037,83.778) R48.1@23.138,83.778 ; 22.23,85.97 cw(c20.037,83.778) R48.1@23.138,83.778 ; 23.27,84.93 cw(c22.119,83.778) R48.1@23.747,83.778 ; 23.27,84.93 cw(c22.119,83.778) R48.1@23.747,83.778 ; 23.27,84.93 cw(c22.119,83.778) R48.1@23.747,83.778 ; R48.1@23.362,84.011 ccw(c22.798,84.575) 23.595,84.575 ; R48.1@23.362,84.011 ccw(c22.798,84.575) 23.595,84.575 ; R48.1@23.362,84.011 ccw(c22.798,84.575) 23.595,84.575 ; 23.595,84.575 ccw(c24.392,84.575) R48.1@23.828,84.011 ; 23.595,84.575 ccw(c24.392,84.575) R48.1@23.828,84.011 ; 23.595,84.575 ccw(c24.392,84.575) R48.1@23.828,84.011 ; 23.595,84.605 R48.1@23.595,83.778 23.595,84.605 ; 23.595,84.605 23.271,83.844 23.595,84.605 ; 23.595,84.605 23.919,83.844 23.595,84.605
"VMOS OUT": R49.1 XS5.4 | length 49.7
  Bottom Layer w0.61: XS5.4@17.626,85.048 15.898,85.048 15.35,84.5 15.35,64.75 17.2,62.9 20.2,62.9 22.2,60.9 22.2,55 29.5,47.7 v3@32.3,47.7
  other v3: 32.5,47.6
VSS: C11.2 C13.2 C15.2 C16.2 F1.5 N1.3 N4.4 | length 113.1
  Top Layer w0.7: v2(46.5,42.6) 51.9,42.6 v2@53.3,44
  Top Layer w1.27: N1.3@45.339,35.814 47.286,35.814 47.9,35.2 v2(57.8,35.2) v2(60,35.2) v2@60.1,35.2 ; N1.3@45.739,35.414 cw(c46.703,34.45) 46.703,35.814 cw(c46.703,37.178) N1.3@45.739,36.214 ; C11.2@67.4,54.2 68.8,52.8 ; C11.2@67.437,53.696 cw(c67.437,52.567) 68.235,53.365 ; C11.2@67.437,53.848 68.8,52.8 ; F1.5@79.776,45.72 ccw(c78.291,45.72) 79.341,46.77 ccw(c80.391,47.82) F1.5@80.391,46.335 ; 68.8,52.8 70.8,52.8 75.4,48.2 77.911,48.2 ; 77.911,48.2 F1.5@80.391,45.72 77.911,48.2
  Bottom Layer w0.7: v3(30.1,52.3) 39.6,52.3 40.987,50.913 40.987,43.713 42.1,42.6 ; 42.55,42.15 42.1,42.6 ; v2(46.5,42.6) 42.1,42.6 ; v2@53.3,43.9 53.5,43.7 64.429,43.7 66.5,45.771 66.5,53.4 C11.2@67.3,54.2
  Bottom Layer w1.27: 42.291,41.9 42.291,37.409 43.886,35.814 ; 43.886,35.814 N1.3@45.339,35.814 ; 43.886,35.814 N1.3@45.339,35.814 ; 43.886,35.814 N1.3@45.339,35.814 ; 43.975,35.814 cw(c43.975,34.45) 44.939,35.414 ccw(c43.975,34.45) 43.975,35.814 ; 43.975,35.814 ccw(c43.975,37.178) 44.939,36.214 cw(c43.975,37.178) 43.975,35.814
  other v2: 55.7,35.3 53.5,43.8
WAT+: R60.1 XS4.3 | length 32.7
  Top Layer w0.61: XS4.3@17.499,71.078 21.182,71.078 R60.1@23.595,68.665 22.96,69.3 ; XS4.3@17.626,71.078 20.305,71.078 ; XS4.3@17.681,70.536 20.305,71.078 ; XS4.3@17.681,71.62 20.305,71.078 ; R60.1@23.213,68.455 21.667,70.593 ; R60.1@23.468,68.665 21.667,70.593 ; R60.1@23.695,68.905 21.667,70.593 ; XS4.3@18.012,70.692 cw(c18.942,69.762) 18.942,71.078 ; XS4.3@18.012,70.692 cw(c18.942,69.762) 18.942,71.078 ; XS4.3@18.012,70.692 cw(c18.942,69.762) 18.942,71.078 ; XS4.3@18.012,71.464 ccw(c18.942,72.394) 18.942,71.078 ; XS4.3@18.012,71.464 ccw(c18.942,72.394) 18.942,71.078 ; XS4.3@18.012,71.464 ccw(c18.942,72.394) 18.942,71.078 ; 22.815,69.445 cw(c22.034,68.665) R60.1@23.138,68.665 ; 22.815,69.445 cw(c22.034,68.665) R60.1@23.138,68.665 ; 22.815,69.445 cw(c22.034,68.665) R60.1@23.138,68.665
WAT-: C31.1 N13.K R59.2 XS4.4 | length 99.3
  Top Layer w0.61: XS4.4@17.499,68.538 21.182,68.538 R59.2@23.595,66.125 ; XS4.4@17.626,68.538 20.305,68.538 ; XS4.4@17.681,67.996 20.305,68.538 ; XS4.4@17.681,69.08 20.305,68.538 ; 22.96,66.76 R59.2@23.595,66.125 ; R59.2@23.138,66.129 C31.1@23.275,63.677 ; R59.2@23.213,65.915 21.667,68.053 ; C31.1@23.266,63.607 23.595,66.049 C31.1@23.924,63.607 ; R59.2@23.266,66.103 23.595,63.661 R59.2@23.924,66.103 ; R59.2@23.395,66.077 C31.1@23.915,63.677 ; C31.1@23.518,63.325 24.56,62.719 ; C31.1@23.595,63.585 R59.2@23.595,66.125 ; R59.2@23.695,66.365 21.667,68.053 ; R59.2@23.722,66.125 C31.1@23.915,63.677 ; R59.2@23.795,66.077 C31.1@23.275,63.677 ; C31.1@23.989,63.78 24.56,62.719 ; C31.1@24,63.3 24.56,62.74 ; R59.2@24.052,66.129 C31.1@23.915,63.677 ; N13.K@29.68,61.013 28.271,61.341 ; N13.K@29.68,61.669 28.271,61.341 ; XS4.4@18.012,68.152 cw(c18.942,67.222) 18.942,68.538 ; XS4.4@18.012,68.152 cw(c18.942,67.222) 18.942,68.538 ; XS4.4@18.012,68.152 cw(c18.942,67.222) 18.942,68.538 ; XS4.4@18.012,68.924 ccw(c18.942,69.854) 18.942,68.538 ; XS4.4@18.012,68.924 ccw(c18.942,69.854) 18.942,68.538 ; XS4.4@18.012,68.924 ccw(c18.942,69.854) 18.942,68.538 ; 21.667,68.053 23.468,66.125 C31.1@23.275,63.677 ; 22.815,66.905 cw(c22.034,66.125) R59.2@23.138,66.125 ; 22.815,66.905 cw(c22.034,66.125) R59.2@23.138,66.125 ; 22.815,66.905 cw(c22.034,66.125) R59.2@23.138,66.125 ; C31.1@23.362,63.818 ccw(c22.798,64.382) 23.595,64.382 ; C31.1@23.362,63.818 ccw(c22.798,64.382) 23.595,64.382 ; C31.1@23.362,63.818 ccw(c22.798,64.382) 23.595,64.382 ; R59.2@23.362,65.892 cw(c22.798,65.328) 23.595,65.328 ; R59.2@23.362,65.892 cw(c22.798,65.328) 23.595,65.328 ; R59.2@23.362,65.892 cw(c22.798,65.328) 23.595,65.328 ; 23.595,64.382 ccw(c24.392,64.382) C31.1@23.828,63.818 ; 23.595,64.382 ccw(c24.392,64.382) C31.1@23.828,63.818 ; 23.595,64.382 ccw(c24.392,64.382) C31.1@23.828,63.818 ; 23.595,65.328 cw(c24.392,65.328) R59.2@23.828,65.892 ; 23.595,65.328 cw(c24.392,65.328) R59.2@23.828,65.892 ; 23.595,65.328 cw(c24.392,65.328) R59.2@23.828,65.892 ; C31.1@23.722,63.585 24.56,62.74 ; C31.1@23.722,63.585 24.56,62.74 ; C31.1@23.722,63.585 24.56,62.719 ; 24.56,62.719 24.56,62.74 ; 24.56,62.719 24.888,62.391 27.221,62.391 28.271,61.341 ; 24.56,62.74 23.986,63.783 24.56,62.74 ; 24.56,62.74 23.522,63.322 24.56,62.74 ; 28.271,61.341 N13.K@29.718,61.341 28.271,61.341 ; 28.921,61.341 cw(c28.921,60.544) 29.485,61.108 ccw(c28.921,60.544) 28.921,61.341 ; 28.921,61.341 ccw(c28.921,62.138) 29.485,61.574 cw(c28.921,62.138) 28.921,61.341 ; C31.1@23.722,63.255 cw(c23.722,62.475) 24.274,63.026 ccw(c23.722,62.475) C31.1@23.722,63.255 ; C31.1@23.727,63.864 cw(c23.711,63.016) 24.56,63.016 ccw(c23.711,63.016) C31.1@23.727,63.864 ; C31.1@23.731,63.864 cw(c23.704,63.008) 24.56,63.008 ccw(c23.704,63.008) C31.1@23.731,63.864 ; C31.1@24.052,63.585 ccw(c24.866,63.585) 24.291,63.009 cw(c24.866,63.585) C31.1@24.052,63.585
pads on no net: K1.0@101.065,100.415 K1.0@106.145,100.415 N4.1 N4.5 N4.8 N6.1 N6.4 N9.1 N9.2 N9.3 N27.3 N27.5 N27.8 XS1.2 XS5.5

## Polygon pours and split planes (outlines as drawn)
GND on Bottom Layer "Top Layer-No Net" (solid, remove dead copper, pour order 1000): 22.5,102.9 22.5,95.5 14.8,95.5 14.8,40.5 22,40.5 22,33.2 84.5,33.2 84.5,47.5 72,47.5 60,59.5 60,60.3 60,89.2 60.1,89.3 95.5,89.3 99,89.3 99.1,89.4 99.1,102.8

## Keep-outs
Keep-Out Layer:
  circle w0.127: c18.769,98.891 r1.778
  circle w0.127: c18.769,37.042 r1.778
  circle w0.127: c120.496,37.042 r1.778
  circle w0.127: c120.496,98.891 r1.778
  lines w0.127: 124.56,32.978 14.705,32.978 14.705,102.955 124.56,102.955 124.56,33.105 ; 60.2,68.596 60.2,82.189 60.2,88.985 103.2,88.985 103.2,63 60.2,63 60.2,68.596 ; 60.2,68.596 60.2,68.596

## Silkscreen, mask and mechanical layers (free items; w line width, h text height)
Top Overlay:
  circle w0.254: c120.45,37.05 r3.3
  circle w0.254: c120.45,98.9 r3.3
  circle w0.254: c92.1,82.2 r3.536
  circle w0.254: c71.2,82.2 r3.413
  circle w0.254: c96.75,75.55 r2.01
  circle w0.254: c66.3,75.6 r1.956
  lines w0.3: 64.35,75.6 68.2,75.6 68.25,75.65 ; 66.3,73.65 66.3,77.5 66.35,77.55 ; 67.7,82.2 74.6,82.2 ; 71.2,78.7 71.2,85.7 ; 88.6,82.2 95.7,82.2 ; 92.2,78.55 92.2,85.55 ; 94.75,75.55 98.7,75.55 ; 96.75,73.55 96.75,77.55
  text "IFAL" at 21.5,94.8 h0.8 r270
  text "IF" at 21.5,90.8 h0.8 r270
  text "VF" at 21.5,88.5 h0.8 r270
  text "VMOS" at 21.5,86.6 h0.8 r270
  text "GND" at 21.5,83.1 h0.8 r270
  text "PULSE" at 21.4,79 h0.8 r270
  text "LD-" at 106.8,76 h0.8 r270
  text "REF" at 21.4,74.5 h0.8 r270
  text "WA+" at 21.4,71.9 h0.8 r270
  text "WA-" at 21.5,69.2 h0.8 r270
  text "LD+" at 107.1,66.6 h0.8 r270
  text "S" at 103,60.5 h1.5 r180
  text "G" at 66.9,59 h1.5
  text "G" at 88,59 h1.5
  text "D" at 74.1,58.9 h1.5
  text "S" at 81,58.9 h1.5
  text "D" at 95.3,58.9 h1.5
  text "300V" at 107,57.5 h0.8 r270
  text "24V+" at 21.4,55 h0.8 r270
  text "24VGND" at 21.3,51.7 h0.8 r270
  text "GND" at 107,47.9 h0.8 r270
  text "RL2.850.093" at 98.9,33.8 h1.78
Bottom Overlay:
  text "+15V" at 81.4,41.2 h1.52
  text "+5V" at 75.9,41.1 h1.52
  text "RL7.820.061" at 116.8,33.3 h1.78 r270
Bottom Solder:
  circle w0.254: c18.75,98.9 r3.3
  circle w0.254: c18.7,37.1 r3.3
  lines w3: 116.305,56.6 116.305,66.125
  lines w3.5: 71.2,58.3 71.2,53.7 72.4,52.5 73.3,51.6 97.8,51.6 102.4,51.6 104,53.2 106.8,56 106.8,63.9 106.8,71.4 108.9,73.5 111.05,75.65 116.305,75.65 ; 92,52.3 92.2,52.5 92.2,59.3 ; 94.7,35.6 96.1,37 100.3,37 107.7,37 108.8,38.1 116.3,45.6 116.3,47.3

## Text inside footprints (layer, text, board x,y; h text height)
C1: Top Overlay "+" at 25.781,60.452 h1.78 r270
C10: Top Overlay "+" at 16.891,43.942 h1.78
C11: Top Overlay "+" at 70.127,53.436 h1.78 r90
C26: Top Overlay "+" at 35.3,96.4 h1.78 r270
C29: Top Overlay "+" at 74.903,96.224 h1.78 r270
C30: Top Overlay "+" at 32.739,96.859 h1.78 r270
C107: Top Overlay "+" at 67.4,44.408 h1.78 r270